# EAGLE board charlieplate6 (EAGLE 6.2)
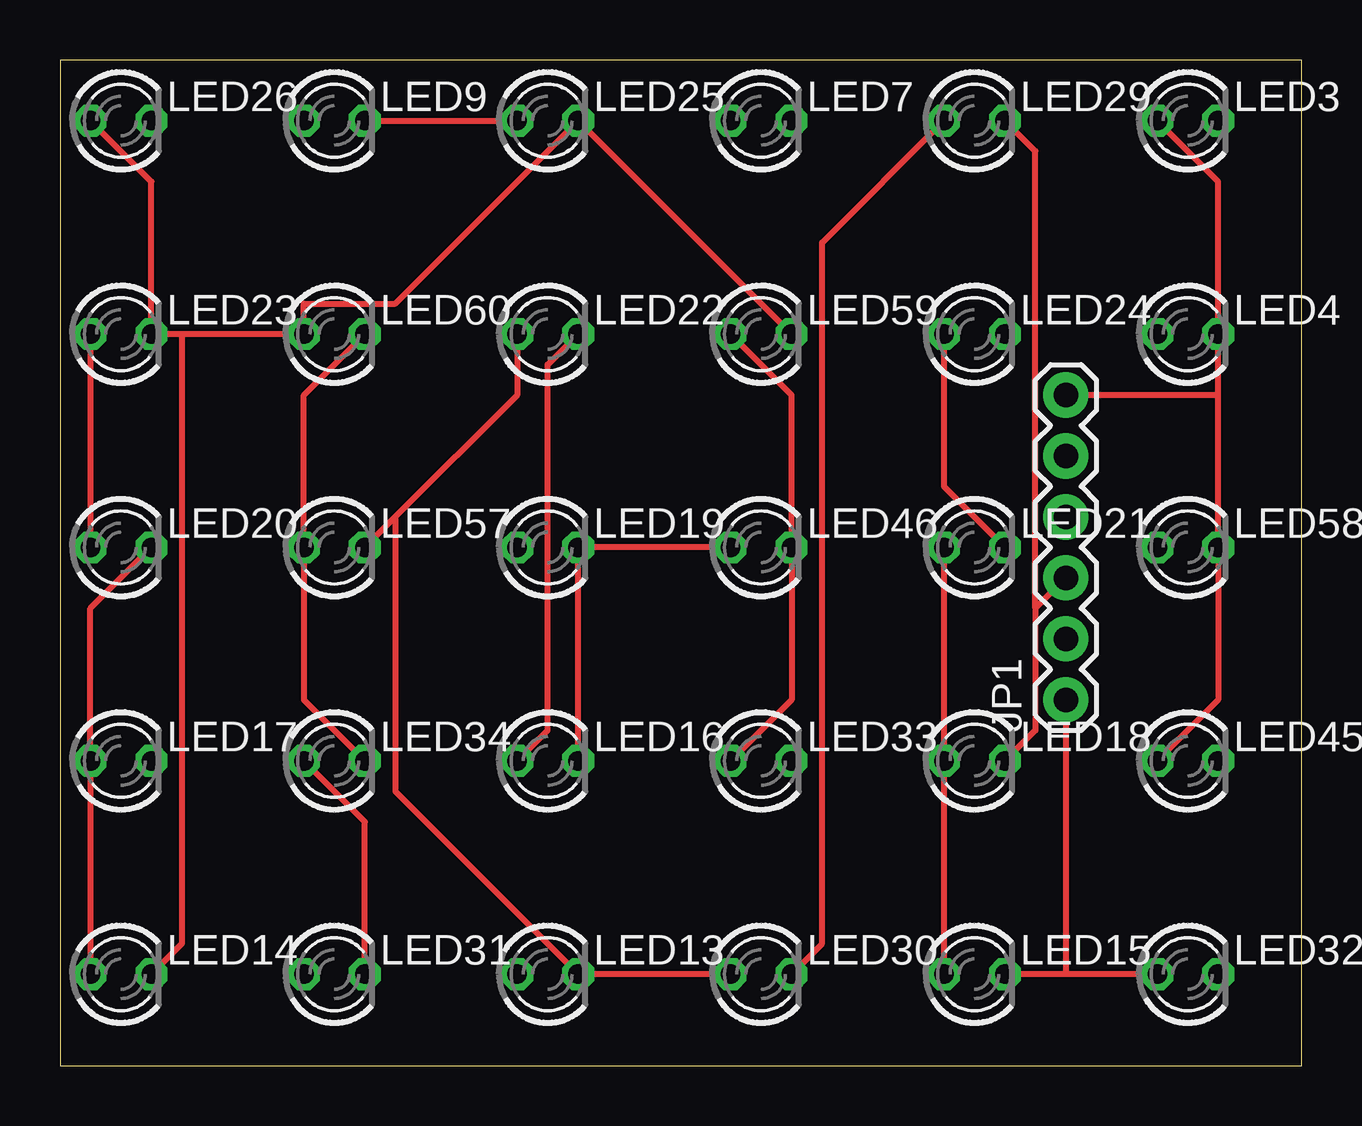
[diagram p0: board, top side]
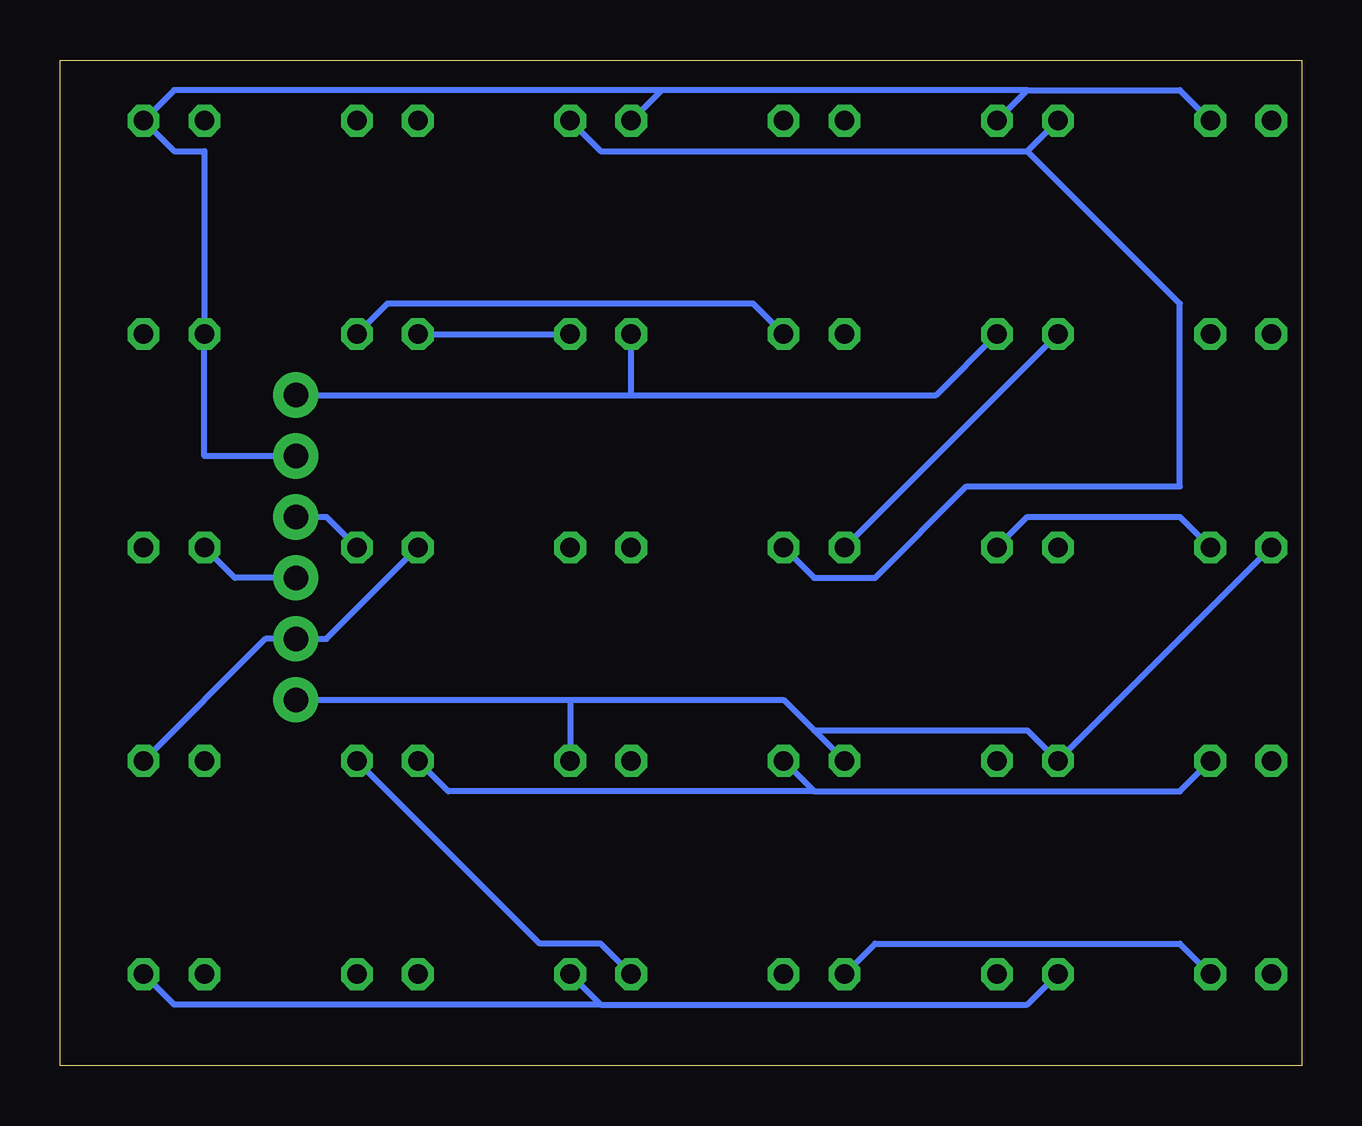
[diagram p1: board, bottom side, seen from below]

Size 51.74 x 41.9 mm. Coordinates in mm from the lower left corner, seen from the top.
Outline: 0,0 51.74,0 51.74,41.9 0,41.9 0,0
Copper layers (1*16): Top 0.035mm / dielectric 1.5mm / Bottom 0.035mm
Design rules: minimum track width 10mil, minimum drill 24mil, track to track 8mil, track to pad 8mil, pad to pad 8mil, via to via 8mil, smd to smd 8mil, copper to edge 40mil, drill to drill 8mil, minimum pad ring 10mil, minimum via ring 8mil, stop-mask expansion 4mil, vias tented up to drill 0mil, thermal gap 10mil

## Footprints (pad centres in the part's own frame; a part is rotated, then mirrored left to right if it is on the bottom)
1X06 = drill 1.016 pad 1.88: 1 0,0; 2 2.54,0; 3 5.08,0; 4 7.62,0; 5 10.16,0; 6 12.7,0
LED3MM = drill 0.813 octagon: A -1.27,0; K 1.27,0

## Placement (x,y rotation side)
JP1  [1X06]  41.91,15.24 90 top
LED3  [LED3MM]  46.99,39.37 0 top
LED4  [LED3MM]  46.99,30.48 0 top
LED7  [LED3MM]  29.21,39.37 0 top
LED9  [LED3MM]  11.43,39.37 0 top
LED13  [LED3MM]  20.32,3.81 0 top
LED14  [LED3MM]  2.54,3.81 0 top
LED15  [LED3MM]  38.1,3.81 0 top
LED16  [LED3MM]  20.32,12.7 0 top
LED17  [LED3MM]  2.54,12.7 0 top
LED18  [LED3MM]  38.1,12.7 0 top
LED19  [LED3MM]  20.32,21.59 0 top
LED20  [LED3MM]  2.54,21.59 0 top
LED21  [LED3MM]  38.1,21.59 0 top
LED22  [LED3MM]  20.32,30.48 0 top
LED23  [LED3MM]  2.54,30.48 0 top
LED24  [LED3MM]  38.1,30.48 0 top
LED25  [LED3MM]  20.32,39.37 0 top
LED26  [LED3MM]  2.54,39.37 0 top
LED29  [LED3MM]  38.1,39.37 0 top
LED30  [LED3MM]  29.21,3.81 0 top
LED31  [LED3MM]  11.43,3.81 0 top
LED32  [LED3MM]  46.99,3.81 0 top
LED33  [LED3MM]  29.21,12.7 0 top
LED34  [LED3MM]  11.43,12.7 0 top
LED45  [LED3MM]  46.99,12.7 0 top
LED46  [LED3MM]  29.21,21.59 0 top
LED57  [LED3MM]  11.43,21.59 0 top
LED58  [LED3MM]  46.99,21.59 0 top
LED59  [LED3MM]  29.21,30.48 0 top
LED60  [LED3MM]  11.43,30.48 0 top

## Library data of the parts
JP1 = SparkFun
LED3 LED4 LED7 LED9 LED13-LED26 LED29-LED34 LED45 LED46 LED57-LED60 = 0-svo

## Nets
N$3: LED29.A LED30.K LED31.A LED32.K
N$5: JP1.1 LED15.K LED16.A LED20.A LED22.K LED23.A LED24.K LED31.K LED32.A LED33.K LED34.A
N$9: JP1.3 LED13.K LED14.A LED17.A LED18.K LED20.K LED22.A LED29.K LED30.A LED57.K LED58.A
N$10: JP1.6 LED3.A LED4.K LED33.A LED34.K LED45.A LED46.K LED57.A LED58.K LED59.A LED60.K
N$11: JP1.4 LED13.A LED14.K LED19.A LED21.K LED23.K LED24.A LED25.K LED26.A LED59.K LED60.A
N$14: JP1.5 LED3.K LED4.A LED7.A LED9.K LED25.A LED26.K
N$16: JP1.2 LED7.K LED9.A LED15.A LED16.K LED17.K LED18.A LED19.K LED21.A LED45.K LED46.A

## Tracks (layer width: path | path; a pad name or v marks a point on that pad's centre or on a via)
N$3
  Top 0.254: LED29.A 31.75,34.29 31.75,5.08 LED30.K
  Bottom 0.254: LED31.A 11.43,2.54 29.21,2.54 | LED30.K 29.21,2.54 | LED32.K 46.99,2.54 29.21,2.54
N$5
  Top 0.254: LED23.A LED20.A | LED34.A 12.7,10.16 LED31.K | LED32.A 41.91,3.81 | 41.91,3.81 LED15.K | LED22.K 20.32,29.21 20.32,13.97 LED16.A | JP1.1 41.91,3.81
  Bottom 0.254: LED20.A LED34.A 11.43,13.97 20.32,13.97 | 20.32,13.97 21.59,15.24 30.48,15.24 | 20.32,13.97 LED16.A | JP1.1 30.48,15.24 | 30.48,15.24 LED33.K | LED24.K 38.1,31.75 22.86,31.75 LED22.K
N$9
  Top 0.254: LED18.K 40.64,13.97 40.64,19.05 | JP1.3 40.64,19.05 | LED29.K 40.64,38.1 40.64,19.05 | LED14.A LED17.A 1.27,19.05 LED20.K | LED30.A LED13.K 13.97,11.43 13.97,22.86 | 13.97,22.86 19.05,27.94 LED22.A | 13.97,22.86 LED57.K
  Bottom 0.254: LED58.A 44.45,20.32 JP1.3 | LED20.K 5.08,22.86 11.43,22.86 LED57.K | LED18.K 31.75,5.08 29.21,5.08 LED30.A
N$10
  Top 0.254: LED33.A 30.48,15.24 LED46.K 30.48,27.94 LED59.A | LED34.K 10.16,15.24 LED57.A 10.16,27.94 LED60.K | LED45.A 48.26,15.24 LED58.K 48.26,27.94 | 48.26,27.94 LED4.K 48.26,36.83 LED3.A | 48.26,27.94 JP1.6
  Bottom 0.254: LED60.K 15.24,27.94 27.94,27.94 | JP1.6 27.94,27.94 | 27.94,27.94 LED59.A
N$11
  Top 0.254: LED59.K LED25.K 13.97,31.75 10.16,31.75 LED60.A 5.08,30.48 | LED21.K 36.83,24.13 LED24.A | 5.08,30.48 LED23.K 3.81,36.83 LED26.A | LED14.K 5.08,5.08 5.08,30.48
  Bottom 0.254: LED21.K 40.64,22.86 JP1.4 | LED24.A LED59.K | LED14.K 5.08,5.08 17.78,5.08 LED13.A | LED60.A LED19.A
N$14
  Top 0.254: LED9.K LED25.A
  Bottom 0.254: JP1.5 45.72,25.4 LED4.A 45.72,38.1 46.99,38.1 LED3.K 46.99,40.64 26.67,40.64 | LED26.K 5.08,40.64 11.43,40.64 | LED9.K 11.43,40.64 | 26.67,40.64 LED7.A | 11.43,40.64 26.67,40.64
N$16
  Top 0.254: LED15.A LED18.A LED21.A | LED46.A LED19.K LED16.K
  Bottom 0.254: LED21.A 40.64,17.78 JP1.2 43.18,17.78 LED45.K | 11.43,38.1 LED9.A | 11.43,38.1 29.21,38.1 LED7.K | LED17.K 5.08,11.43 20.32,11.43 | LED16.K 20.32,11.43 | 11.43,38.1 5.08,31.75 5.08,24.13 13.97,24.13 17.78,20.32 20.32,20.32 LED19.K | LED18.A 35.56,11.43 20.32,11.43